# EAGLE board drl_replace_variant (EAGLE 6.4)
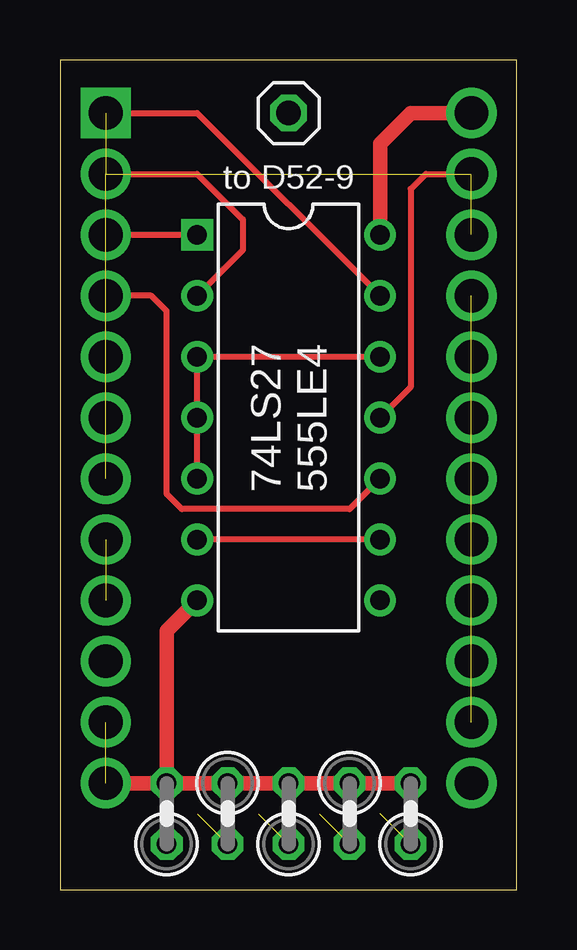
[diagram p0: board, top side]
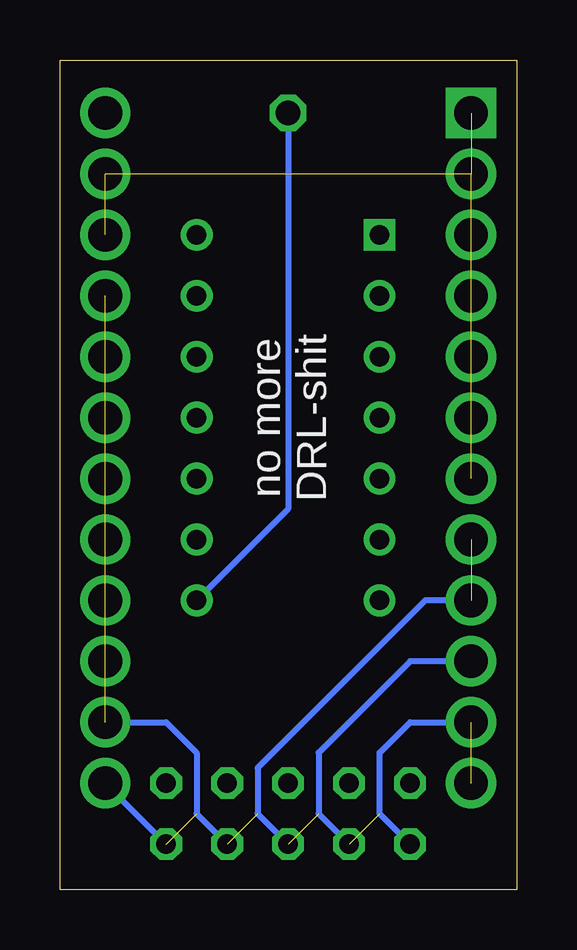
[diagram p1: board, bottom side, seen from below]

Size 19.03 x 34.59 mm. Coordinates in mm from the lower left corner, seen from the top.
Outline: 0,0 19.03,0 19.03,34.59 0,34.59 0,0
Copper layers (1*16): Top 0.035mm / dielectric 1.5mm / Bottom 0.035mm
Design rules "default": minimum track width 10mil, minimum drill 24mil, track to track 8mil, track to pad 8mil, pad to pad 8mil, via to via 8mil, smd to smd 8mil, copper to edge 40mil, drill to drill 8mil, minimum pad ring 10mil, minimum via ring 8mil, stop-mask expansion 4mil, vias tented up to drill 0mil, thermal gap 10mil

## Footprints (pad centres in the part's own frame; a part is rotated, then mirrored left to right if it is on the bottom)
0207/2V = drill 0.813 octagon: 1 -1.27,0; 2 1.27,0
DIL14 = drill 0.813 square: 1 -7.62,-3.81 | drill 0.813: 2 -5.08,-3.81; 3 -2.54,-3.81; 4 0,-3.81; 5 2.54,-3.81; 6 5.08,-3.81; 7 7.62,-3.81; 8 7.62,3.81; 9 5.08,3.81; 10 2.54,3.81; 11 0,3.81; 12 -2.54,3.81; 13 -5.08,3.81; 14 -7.62,3.81
1X01 = drill 1.016 octagon: 1 0,0

## Placement (x,y rotation side)
E$1  [0207/2V]  4.45,3.18 90 top
E$2  [0207/2V]  6.98,3.18 270 top
E$3  [0207/2V]  9.53,3.18 90 top
E$4  [0207/2V]  12.07,3.18 270 top
E$5  [0207/2V]  14.61,3.18 90 top
IC4  74LS27N  [DIL14]  9.53,19.68 270 top
JP1  [1X01]  9.53,32.39 0 top

## Library data of the parts
E$1-E$5 = rcl
IC4 = 74xx-eu
JP1 = pinhead

## Nets
N$1: IC4.14
N$2: E$2.1 E$3.2 E$4.1 E$5.2 IC4.7
N$5: E$1.1 E$2.2 E$3.1 E$4.2 E$5.1
N$12: IC4.3 IC4.4 IC4.5 IC4.12
N$13: IC4.10
N$14: IC4.11
N$15: IC4.13
N$16: IC4.1
N$17: IC4.2
N$18: IC4.6 IC4.9
S$1: IC4.8 JP1.1

## Tracks (layer width: path | path; a pad name or v marks a point on that pad's centre or on a via)
N$1
  Top 0.61: 17.15,32.39 14.61,32.39 13.34,31.11 IC4.14
N$2
  Top 0.61: 1.91,4.45 4.45,4.45 | 4.45,4.45 4.45,10.79 IC4.7 | 4.45,4.45 E$2.1 E$3.2 E$4.1 E$5.2
N$3  (via drill 1.4)  (8 unrouted)
  other vias: 1.91,29.85 1.91,27.3 1.91,24.76 1.91,22.22 1.91,19.68 1.91,17.14 17.15,29.85 17.15,27.3 1.91,32.39
N$4  (via drill 1.4)
  other vias: 17.15,32.39
N$5  (via drill 1.4)  (13 unrouted)
  Bottom 0.254: v17.15,4.45 E$5.1 | v17.15,6.98 14.61,6.98 13.34,5.71 13.34,3.18 E$4.2 | E$1.1 5.72,3.18 5.72,5.71 4.45,6.98 v1.91,6.98 | v1.91,9.52 4.45,9.52 8.26,5.71 8.26,3.18 E$2.2 | v1.91,12.07 3.81,12.07 10.8,5.08 10.8,3.18 E$3.1
  other vias: 1.91,14.61 1.91,4.45 17.15,24.76 17.15,22.22 17.15,19.68 17.15,17.14 17.15,14.61 17.15,12.07 17.15,9.52
N$12
  Top 0.254: IC4.5 IC4.4 IC4.3 IC4.12
N$13
  Top 0.254: IC4.10 12.07,15.88 5.08,15.88 4.45,16.51 4.45,24.13 3.81,24.76 1.91,24.76
N$14
  Top 0.254: IC4.11 14.61,20.96 14.61,29.21 15.24,29.85 17.15,29.85
N$15
  Top 0.254: 1.91,32.39 5.72,32.39 IC4.13
N$16
  Top 0.254: 1.91,27.3 IC4.1
N$17
  Top 0.254: 1.91,29.85 5.72,29.85 7.62,27.94 7.62,26.67 IC4.2
N$18
  Top 0.254: IC4.9 IC4.6
S$1
  Bottom 0.254: JP1.1 9.53,15.88 IC4.8

## Text on the board
tPlace: to D52-9 | 74LS27 / 555LE4
bPlace: no more / DRL-shit